# Altium PCB VRM.PcbDoc
Units mil, origin at the board's own origin, x right, y up, seen from the top; angles counter-clockwise.
Board outline 6000 x 4000 mil, 2 copper layers (Top Layer, Bottom Layer); 25 components, 45 nets, 122 pads, 15 vias.
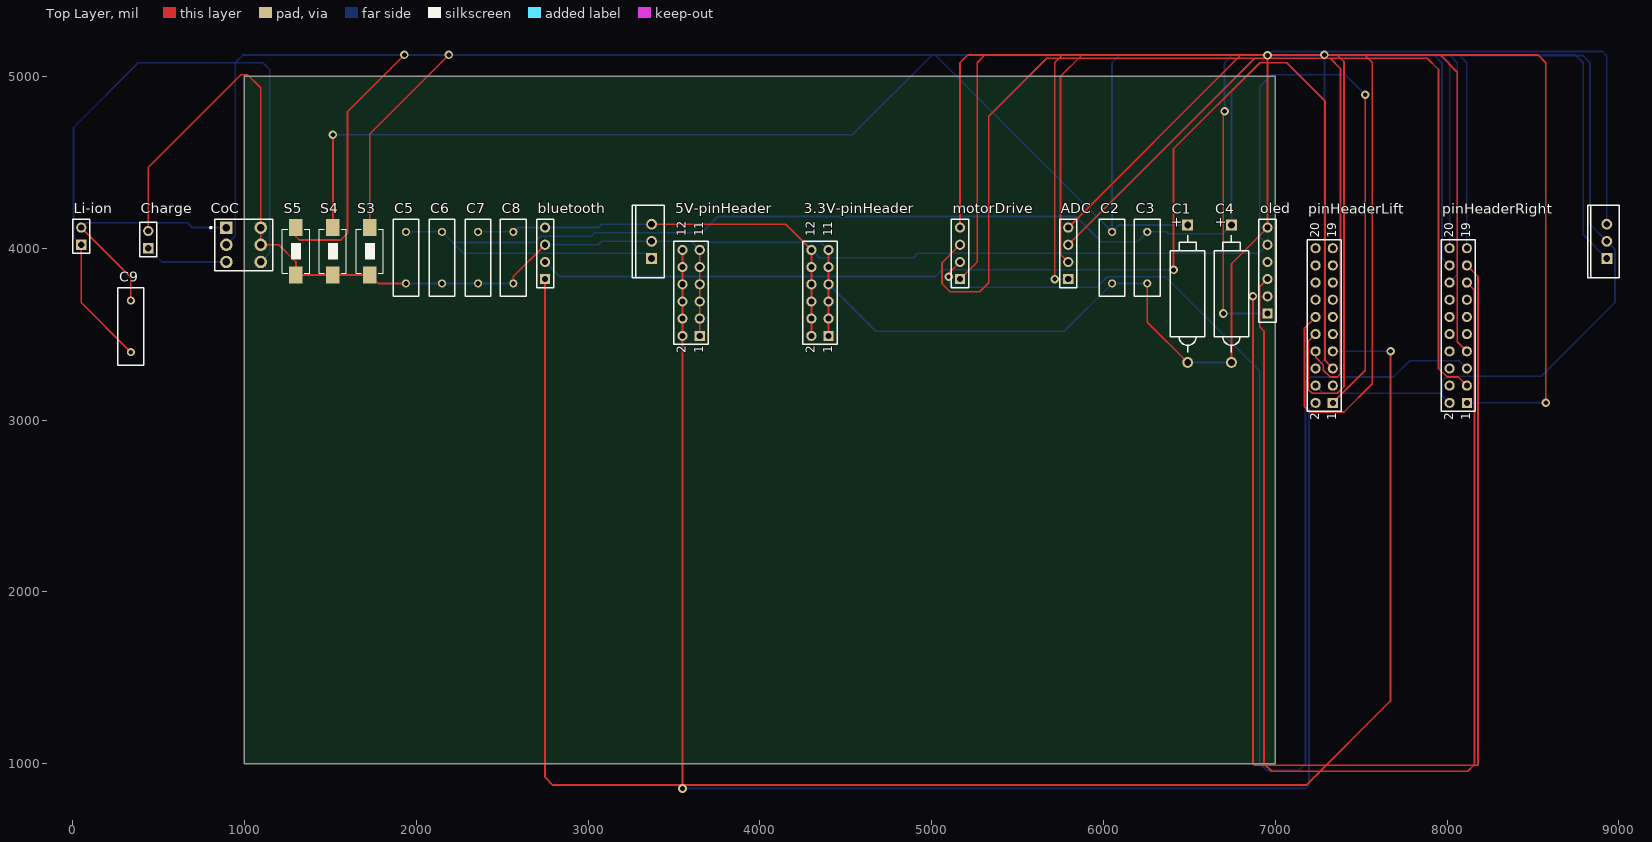
[diagram p0: Top Layer view]
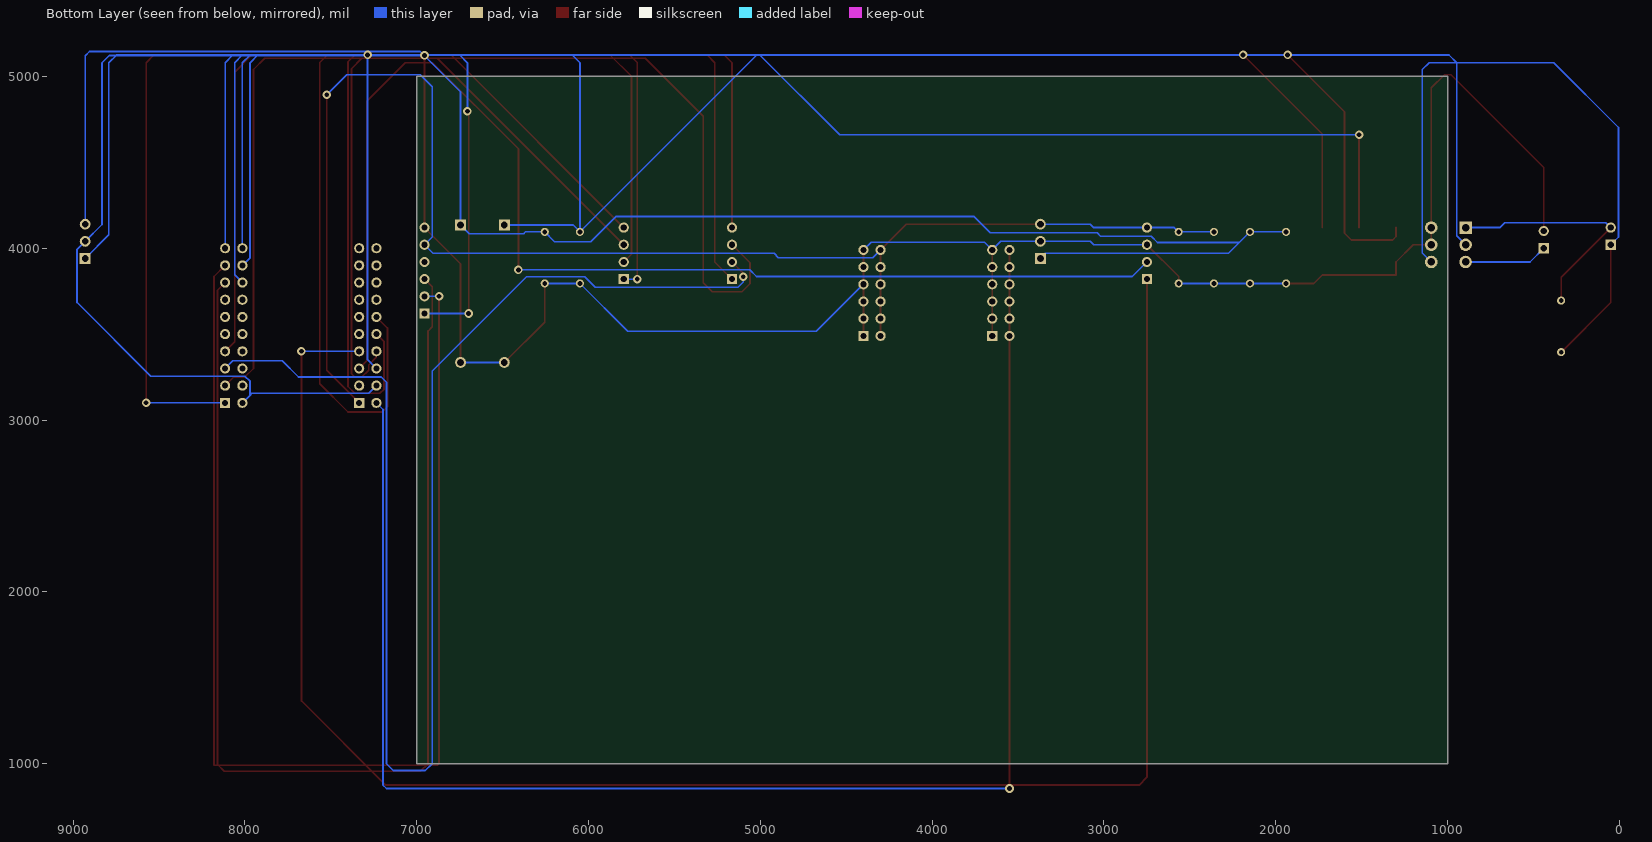
[diagram p1: Bottom Layer view, seen from below]

## Layer stack, top to bottom
Top Solder: solder mask 0.4, Solder Resist, Dk 3.5
Top Layer: signal copper 1.4
Dielectric 1: dielectric 12.6, FR-4, Dk 4.8
Bottom Layer: signal copper 1.4
Bottom Solder: solder mask 0.4, Solder Resist, Dk 3.5

## Board outline
1000,1000 7000,1000 7000,5000 1000,5000

## Design rules (kind name [scope] priority, off if disabled: settings)
Clearance [All] p1: gap=10 ignorepadtopadclearanceinfootprint=FALSE except(0: Arc-Hole Track-Hole SMDPad-Hole THPad-Hole Via-Hole Fill-Hole Poly-Hole Region-Hole Text-Hole)
PolygonConnect [All] p1: connectstyle=Relief reliefconductorwidth=10 reliefentries=4 polygonreliefangle="90 Angle" airgapwidth=10
RoomDefinition VRM [InComponentClass('VRM')] p1: confinementstyle=ConfineIn formatcopy=TRUE lockcomponents=FALSE outline 0,2985 9235,2985 9235,4280 0,4280
RoutingVias [All] p1: holewidth=28 width=50 viastyle="Through Hole" minholewidth=28 minwidth=50 maxholewidth=28 maxwidth=50
SolderMaskExpansion [All] p1: expansion=4
Width [All] p1: maxlimit=10 minlimit=10 preferedwidth=10
30 further rules are at their usual default settings.

## Components (designator, comment, footprint, x,y, rotation, side; value= is the part's Value field where it differs from the comment)
3.3V-pinHeader "Header 6X2" HDR2X6 4400,3490 r90 top
5V-pinHeader "Header 6X2" HDR2X6 3650,3490 r90 top
ADC "Header 4" HDR1X4 5795,3820 r90 top
bluetooth "Header 4" HDR1X4 2750,3820 r90 top
C1 "" POLAR0.8 6490,3735 r90 top value=107
C2 "" RAD-0.3 6050,3945 r90 top value=104
C3 "" RAD-0.3 6255,3945 r90 top value=104
C4 "" POLAR0.8 6745,3735 r90 top value=107
C5 "" RAD-0.3 1940,3945 r90 top value=106
C6 "" RAD-0.3 2150,3945 r90 top value=104
C7 "" RAD-0.3 2360,3945 r90 top value=106
C8 "" RAD-0.3 2565,3945 r90 top value=104
C9 "" RAD-0.3 338.94,3545 r90 top value=220uf
Charge "" HDR1X2 440,4000 r90 top
CoC "SW-DPDT" DPDT-6 995,4020 r0 top
Li-ion "" HDR1X2 50,4020 r90 top
motorDrive "Header 4" HDR1X4 5165,3820 r90 top
oled "Header 6" HDR1X6 6955,3620 r90 top
pinHeaderLift "Header 10X2" HDR2X10 7335,3100 r90 top
pinHeaderRight "Header 10X2" HDR2X10 8115,3100 r90 top
S3 "" SW_PB2_A1 1730,3980 r0 top
S4 "" SW_PB2_A1 1515,3980 r0 top
S5 "" SW_PB2_A1 1300,3980 r0 top
? "ASN1117" T03B 3370,4040 r90 top
? "LM2940" T03B 8930,4040 r90 top

## Footprints (in the part's own frame and the unit in brackets; to place one, negate y for a bottom-side part, rotate by r counter-clockwise, add the part's x,y. Pads: shape width x height; smd on the part's side, far side on the other; paste and mask are expansions set on the pad)
DPDT-6 [mm] "Switch; 6 Leads"
  rect 1.85x1.85 hole 1.1: 1(-2.54,2.54)
  round 1.85 hole 1.1: 2(-2.54,0) 3(-2.54,-2.54) 4(2.54,-2.54) 5(2.54,0) 6(2.54,2.54)
  silkscreen extent -4.96,-3.81 4.28,3.81
HDR1X2 [mm] "Connector; Header; 2 Position"
  rect 1.5x1.5 hole 0.9: 1(0,0)
  round 1.5 hole 0.9: 2(2.54,0)
  silkscreen extent -1.27,-1.27 3.81,1.27
HDR1X4 [mm] "Connector; Header; 4 Position"
  rect 1.5x1.5 hole 0.9: 1(0,0)
  round 1.5 hole 0.9: 2(2.54,0) 3(5.08,0) 4(7.62,0)
  silkscreen extent -1.27,-1.27 8.89,1.27
HDR1X6 [mm] "Connector; Header; 6 Position"
  rect 1.5x1.5 hole 0.9: 1(0,0)
  round 1.5 hole 0.9: 2(2.54,0) 3(5.08,0) 4(7.62,0) 5(10.16,0) 6(12.7,0)
  silkscreen extent -1.27,-1.27 13.97,1.27
HDR2X6 [mm] "Connector; Header; 6x2 Position"
  rect 1.5x1.5 hole 0.9: 1(0,0)
  round 1.5 hole 0.9: 2(0,2.54) 3(2.54,0) 4(2.54,2.54) 5(5.08,0) 6(5.08,2.54) 7(7.62,0) 8(7.62,2.54) 9(10.16,0) 10(10.16,2.54) 11(12.7,0) 12(12.7,2.54)
  silkscreen extent -1.27,-1.27 13.97,3.81
HDR2X10 [mm] "Connector; Header; 10x2 Position"
  rect 1.5x1.5 hole 0.9: 1(0,0)
  round 1.5 hole 0.9: 2(0,2.54) 3(2.54,0) 4(2.54,2.54) 5(5.08,0) 6(5.08,2.54) 7(7.62,0) 8(7.62,2.54) 9(10.16,0) 10(10.16,2.54) 11(12.7,0) 12(12.7,2.54) 13(15.24,0) 14(15.24,2.54) 15(17.78,0) 16(17.78,2.54) 17(20.32,0) 18(20.32,2.54) 19(22.86,0) 20(22.86,2.54)
  silkscreen extent -1.27,-1.27 24.13,3.81
POLAR0.8 [mm] "Polarized Capacitor; 2 Leads"
  rect 1.6x1.6 hole 1: 1(10.16,0)
  round 1.6 hole 1: 2(-10.16,0)
  silkscreen extent -8.64,-2.54 8.64,2.54
RAD-0.3 [mm] "Radial Cap, Thru-Hole; 2 Leads; 0.3 in Pin Spacing"
  round 1.2 hole 0.7: 1(-3.81,0) 2(3.81,0)
  silkscreen extent -5.71,-1.91 5.71,1.91
SW_PB2_A1 [mm]
  rect 2x2.5 smd: 1(0,3.556) 2(0,-3.444)
  silkscreen extent -2,-3.19 2,3.31, body extent -2.03,-3.17 2.03,3.3, height 1.2
T03B [mm] "TO, Thru-Hole, Vertical, Heatsink Mounted; 3 In-Line Leads; Pitch 2.54 mm"
  rect 1.6x1.6 hole 1: 1(-2.54,0)
  round 1.6 hole 1: 2(0,0) 3(2.54,0)
  silkscreen extent -5.35,-1.85 5.35,2.85

## Part data
3.3V-pinHeader 5V-pinHeader: "Header, 6-Pin, Dual row", LatestRevisionDate=17-Jul-2002, LatestRevisionNote="Re-released for DXP Platform.", Publisher="Altium Limited"
ADC bluetooth motorDrive: "Header, 4-Pin", LatestRevisionDate=17-Jul-2002, LatestRevisionNote="Re-released for DXP Platform.", Publisher="Altium Limited"
C1 C4: library part "Cap Pol2", "Polarized Capacitor (Axial)", LatestRevisionDate=17-Jul-2002, LatestRevisionNote="Re-released for DXP Platform.", PackageDescription="Polarized Capacitor; 2 Leads", PackageReference=POLAR0.8, Published=8-Jun-2000, Publisher="Altium Limited"
C2 C3 C5 C6 C7 C8 C9: library part Cap, "Capacitor", LatestRevisionDate=17-Jul-2002, LatestRevisionNote="Re-released for DXP Platform.", PackageDescription="Radial Cap, Thru-Hole; 2 Leads; 0.3 in Pin Spacing", PackageReference=RAD-0.3, Published=8-Jun-2000, Publisher="Altium Limited"
Charge Li-ion: library part "Header 2", "Header, 2-Pin", LatestRevisionDate=17-Jul-2002, LatestRevisionNote="Re-released for DXP Platform.", Publisher="Altium Limited"
CoC: "Double-Pole, Double-Throw Switch", LatestRevisionDate=17-Jul-2002, LatestRevisionNote="Re-released for DXP Platform.", PackageDescription="Switch; 6 Leads", PackageReference=DPDT-6, Published=24-Mar-1999, Publisher="Altium Limited"
oled: "Header, 6-Pin", LatestRevisionDate=17-Jul-2002, LatestRevisionNote="Re-released for DXP Platform.", Publisher="Altium Limited"
pinHeaderLift pinHeaderRight: "Header, 10-Pin, Dual row", LatestRevisionDate=17-Jul-2002, LatestRevisionNote="Re-released for DXP Platform.", Publisher="Altium Limited"
S3 S4 S5: library part SW-PB, "微动开关", LatestRevisionDate=17-Jul-2002, LatestRevisionNote="Re-released for DXP Platform.", PackageReference=SPST-2, Published=24-Mar-1999, Publisher="Altium Limited"
? ?: library part LM2940CT-5.0, "1A 5V", ComponentLink1Description="Manufacturer Link", ComponentLink1URL=http://www.national.com/, ComponentLink2Description=Datasheet, ComponentLink2URL=http://www.national.com/ds.cgi/LM/LM2940.pdf, ComponentLink3Description="URL Link1", ComponentLink3URL=http://www.national.com/pf/LM/LM2940C.html, DatasheetVersion=Jun-1999, Note="Tab is connected to GND", PackageDescription="TO, Thru-Hole, Vertical, Heatsink Mounted; 3 In-Line Leads; Pitch 2.54 mm", PackageReference=T03B, PackageVersion=1995, Published=15-Apr-2002, Publisher="Altium Limited"

## Via types
v1: diameter 50, hole 28, Top Layer to Bottom Layer, 15 vias

## Nets (pads, with @x,y where several pads share a name; then routed paths per layer and width w, separated by ;. In a path a pad name is that pad's centre, name@x,y a point inside that pad or via, vN(x,y) a via of type N, cw(c..) or ccw(c..) an arc to the next point about the centre after c; other vN are vias at no path point)
3.3v: 3.3V-pinHeader.2 3.3V-pinHeader.4 3.3V-pinHeader.6 3.3V-pinHeader.8 3.3V-pinHeader.10 3.3V-pinHeader.12 ?.3@3370,4140 bluetooth.4 C7.2 C8.2 oled.5 pinHeaderLift.1 | length 8726.9
  Top Layer w10: ?.3@3370,4140 4150,4140 3.3V-pinHeader.12 3.3V-pinHeader.10 3.3V-pinHeader.8 3.3V-pinHeader.6 3.3V-pinHeader.4 3.3V-pinHeader.2 ; pinHeaderLift.1 7524,3289 v1(7524,4893)
  Bottom Layer w10: C7.2 C8.2 2590,4120 bluetooth.4 3060,4120 3080,4140 ?.3@3370,4140 ; 3.3V-pinHeader.12 4345,3945 4895,3945 4920,3970 6905,3970 oled.5 6910,4065 6910,4940 6980,5010 7407,5010 v1(7524,4893)
5v: ?.1@3370,3940 ?.3@8930,4140 C3.2 C4.1 C5.2 C6.2 | length 10264.8
  Bottom Layer w10: C5.2 C6.2 2212,4033 ; ?.1@3370,3940 3343,3940 3343,3970 2275,3970 2212,4033 ; ?.3@8930,4140 8930,5120 8905,5145 6980,5145 6745,4910 C4.1 6694,4084 6378,4084 6367,4095 C3.2 6198,4038 5988,4038 5842,4184 3755,4184 3661,4090 3040,4090 3020,4070 2725,4070 2688,4033 2212,4033
7.2v: ?.1@8930,3940 C1.1 C2.2 CoC.2 | length 12047.8
  Bottom Layer w10: CoC.2 947,4072 947,5080 992,5125 5020,5125 C2.2 ; C1.1 6090,4135 C2.2 ; ?.1@8930,3940 8792,4078 8792,5080 8747,5125 6095,5125 6050,5080 C2.2
+5: 5V-pinHeader.2 5V-pinHeader.4 5V-pinHeader.6 5V-pinHeader.8 5V-pinHeader.10 5V-pinHeader.12 pinHeaderLift.2 | length 9030.4
  Top Layer w10: v1(3550,855) 5V-pinHeader.2 5V-pinHeader.4 5V-pinHeader.6 5V-pinHeader.8 5V-pinHeader.10 5V-pinHeader.12
  Bottom Layer w10: v1(3550,855) 7176,855 7196,875 7196,3061 pinHeaderLift.2
GND: 3.3V-pinHeader.1 3.3V-pinHeader.3 3.3V-pinHeader.5 3.3V-pinHeader.7 3.3V-pinHeader.9 3.3V-pinHeader.11 5V-pinHeader.1 5V-pinHeader.3 5V-pinHeader.5 5V-pinHeader.7 5V-pinHeader.9 5V-pinHeader.11 ?.2 bluetooth.3 C1.2 C2.1 C3.1 C4.2 C5.1 C6.1 C7.1 C8.1 Charge.2 CoC.5 CoC.6 oled.6 pinHeaderLift.4 pinHeaderRight.2 S3.2 S4.2 S5.2 | length 17038.3
  Top Layer w10: Charge.2 440,4470 980,5010 1018,5010 1095,4933 CoC.6 CoC.5 1200,4020 1300,3920 S5.2 S4.2 S3.2 1779.41,3795 C5.1 ; C8.1 2565,3835 bluetooth.3 ; 5V-pinHeader.1 5V-pinHeader.3 5V-pinHeader.5 5V-pinHeader.7 5V-pinHeader.9 5V-pinHeader.11 ; 3.3V-pinHeader.1 3.3V-pinHeader.3 3.3V-pinHeader.5 3.3V-pinHeader.7 3.3V-pinHeader.9 3.3V-pinHeader.11 ; C3.1 6255,3570 C1.2 ; C4.2 6745,3910 oled.6 v1(6955,5122)
  Bottom Layer w10: C5.1 C6.1 C7.1 C8.1 ; bluetooth.3 3060,4020 3080,4040 3370,4040 3600,4040 5V-pinHeader.11 3695,4035 4355,4035 3.3V-pinHeader.11 ; 3.3V-pinHeader.7 4674,3516 5771,3516 C2.1 C3.1 ; C1.2 C4.2 ; v1(6955,5122) 8790,5122 8832,5080 8832,4138 8930,4040 8977,3993 8977,3684 8548,3255 8000,3255 7970,3225 7970,3145 ; pinHeaderLift.4 7280,3155 7960,3155 7970,3145 ; pinHeaderRight.2 7970,3145
NetC9_1: C9.1 CoC.4 Li-ion.1 | length 3902.6
  Top Layer w10: Li-ion.1 50,3683.94 C9.1
  Bottom Layer w10: Li-ion.1 5,4065 5,4703 382,5080 1107,5080 1147,5040 1147,3972 CoC.4
NetC9_2: C9.2 CoC.1 Li-ion.2 | length 1413.7
  Top Layer w10: Li-ion.2 338.94,3831.06 C9.2
  Bottom Layer w10: Li-ion.2 79,4149 668,4149 697,4120 CoC.1
NetCharge_1: Charge.1 CoC.3 | length 488.1
  Bottom Layer w10: Charge.1 520,3920 CoC.3
P1.2: pinHeaderRight.11
P1.3: pinHeaderRight.9
P1.4: motorDrive.1 pinHeaderRight.7 | length 5804.3
  Top Layer w10: motorDrive.1 5265,3920 5265,5080 5310,5125 7960,5125 8060,5025 8060,3455 pinHeaderRight.7
P1.5: motorDrive.2 pinHeaderRight.5 | length 8032.6
  Top Layer w10: v1(5100,3834) 5100,3855 motorDrive.2
  Bottom Layer w10: v1(5100,3834) 5100,3803 5130,3773 5960,3773 6021,3834 6361,3834 6910,3285 6910,1000 6950,960 7136,960 7176,1000 7176,3220 7206,3250 7688,3250 7783,3345 8070,3345 pinHeaderRight.5
P1.6: pinHeaderLift.9
P2.0: pinHeaderRight.4
P2.2: pinHeaderRight.6
P2.3: pinHeaderRight.18 S4.1 | length 8404.9
  Top Layer w10: S4.1 v1(1515,4660)
  Bottom Layer w10: v1(1515,4660) 4538,4660 5003,5125 7925,5125 7970,5080 7970,3945 pinHeaderRight.18
P2.4: motorDrive.3 pinHeaderRight.3 | length 6281.9
  Top Layer w10: motorDrive.3 5060,3915 5060,3793.84 5106.84,3747 5280,3747 5333,3800 5333,4768 5670,5105 7885,5105 7950,5040 7950,3300 8000,3250 8065,3250 pinHeaderRight.3
P2.5: motorDrive.4 pinHeaderRight.1 | length 6847.3
  Top Layer w10: motorDrive.4 5165,5080 5210,5125 8530,5125 8575,5080 v1(8575,3100)
  Bottom Layer w10: pinHeaderRight.1 v1(8575,3100)
P2.6: pinHeaderRight.16 S3.1 | length 8382.8
  Top Layer w10: S3.1 1730,4665 v1(2190,5125)
  Bottom Layer w10: v1(2190,5125) 8015,5125 8060,5080 8060,3845 pinHeaderRight.16
P2.7: pinHeaderLift.15
P3.0: pinHeaderRight.12
P3.1: pinHeaderRight.14
P3.2: pinHeaderLift.13
P3.3: bluetooth.1 pinHeaderLift.7 | length 10413.6
  Top Layer w10: bluetooth.1 2750,920 2795,875 7181,875 7671,1365 v1(7671,3400)
  Bottom Layer w10: pinHeaderLift.7 v1(7671,3400)
P3.4: bluetooth.2 pinHeaderLift.5 | length 7171.5
  Top Layer w10: v1(6408,3874) 6408,4579.32 6908.68,5080 7066,5080 7290,4856 7290,3345 pinHeaderLift.5
  Bottom Layer w10: bluetooth.2 2835,3835 5022.47,3835 5061.47,3874 v1(6408,3874)
P3.5: pinHeaderLift.20
P3.6: pinHeaderLift.18
P3.7: oled.2 pinHeaderRight.17 | length 7056.1
  Top Layer w10: v1(6870,3720) 6870,1000 6880,990 8180,990 8180,3835 pinHeaderRight.17
  Bottom Layer w10: v1(6870,3720) oled.2
P4.0: oled.3 pinHeaderRight.15 | length 6933.4
  Top Layer w10: oled.3 6910,3775 6910,3542 6934,3518 6934,1000 6979,955 8120,955 8160,995 8160,3755 pinHeaderRight.15
P4.1: pinHeaderLift.19
P4.2: pinHeaderLift.17
P4.3: pinHeaderRight.13
P4.5: oled.4
P6.0: ADC.4 pinHeaderLift.6 | length 3753.4
  Top Layer w10: ADC.4 6800,5125 v1(7286,5125)
  Bottom Layer w10: pinHeaderLift.6 7286,3351 v1(7286,5125)
P6.1: ADC.3 pinHeaderLift.8 | length 4087.8
  Top Layer w10: ADC.3 6880,5105 7320,5105 7380,5045 7380,3270 7360,3250 7320,3250 7279.53,3290.47 7279.53,3320 7235,3364.53 pinHeaderLift.8
P6.2: ADC.2 pinHeaderLift.10 | length 5282.5
  Top Layer w10: ADC.2 5750,3965 5750,5000 5875,5125 7360,5125 7400,5085 7400,3195 7360,3155 7215,3155 7190,3180 7190,3455 pinHeaderLift.10
P6.3: ADC.1 pinHeaderLift.12 | length 6118.7
  Top Layer w10: v1(5716,3820) 5716,5081 5760,5125 7520,5125 7564,5081 7564,3211 7400,3047 7200,3047 7170,3077 7170,3535 pinHeaderLift.12
  Bottom Layer w10: v1(5716,3820) ADC.1
P6.4: pinHeaderLift.14
P6.5: pinHeaderLift.3
P6.6: pinHeaderLift.11
P7.0: pinHeaderLift.16
P7.4: pinHeaderRight.8
P8.1: pinHeaderRight.20 S5.1 | length 8733.6
  Top Layer w10: S5.1 1300,4068 1320,4048 1560,4048 1600,4088 1600,4794 v1(1931,5125)
  Bottom Layer w10: v1(1931,5125) 7970,5125 8015,5080 pinHeaderRight.20
P8.2: oled.1 pinHeaderRight.19 | length 4247.2
  Top Layer w10: v1(6698,3620) 6698,4790 v1(6705,4797)
  Bottom Layer w10: v1(6698,3620) oled.1 ; v1(6705,4797) 6705,5080 6750,5125 8070,5125 8115,5080 pinHeaderRight.19
RST: pinHeaderRight.10

## Text inside footprints (layer, text, board x,y; h text height)
3.3V-pinHeader: Top Overlay "12" at 4320,4070 h50 r90; Top Overlay "1" at 4420,4110 h50 r90; Top Overlay "1" at 4420,4070 h50 r90; Top Overlay "1" at 4420,3390 h50 r90; Top Overlay "2" at 4320,3390 h50 r90
5V-pinHeader: Top Overlay "12" at 3570,4070 h50 r90; Top Overlay "1" at 3670,4110 h50 r90; Top Overlay "1" at 3670,4070 h50 r90; Top Overlay "1" at 3670,3390 h50 r90; Top Overlay "2" at 3570,3390 h50 r90
C1: Top Overlay "+" at 6452.6,4115 h59.06 r90
C4: Top Overlay "+" at 6707.6,4115 h59.06 r90
pinHeaderLift: Top Overlay "20" at 7255,4060 h50 r90; Top Overlay "19" at 7355,4060 h50 r90; Top Overlay "1" at 7355,3000 h50 r90; Top Overlay "2" at 7255,3000 h50 r90
pinHeaderRight: Top Overlay "20" at 8035,4060 h50 r90; Top Overlay "19" at 8135,4060 h50 r90; Top Overlay "1" at 8135,3000 h50 r90; Top Overlay "2" at 8035,3000 h50 r90